# Altium PCB 94KA02-V1.PcbDoc (part 1 of 2)
Units mil, origin at the board's own origin, x right, y up, seen from the top; angles counter-clockwise.
Board outline 3951 x 3526 mil, 2 copper layers (Top Layer, Bottom Layer); 144 components, 142 nets, 661 pads, 434 vias.
Unrouted connection lines stored in the file: 1.
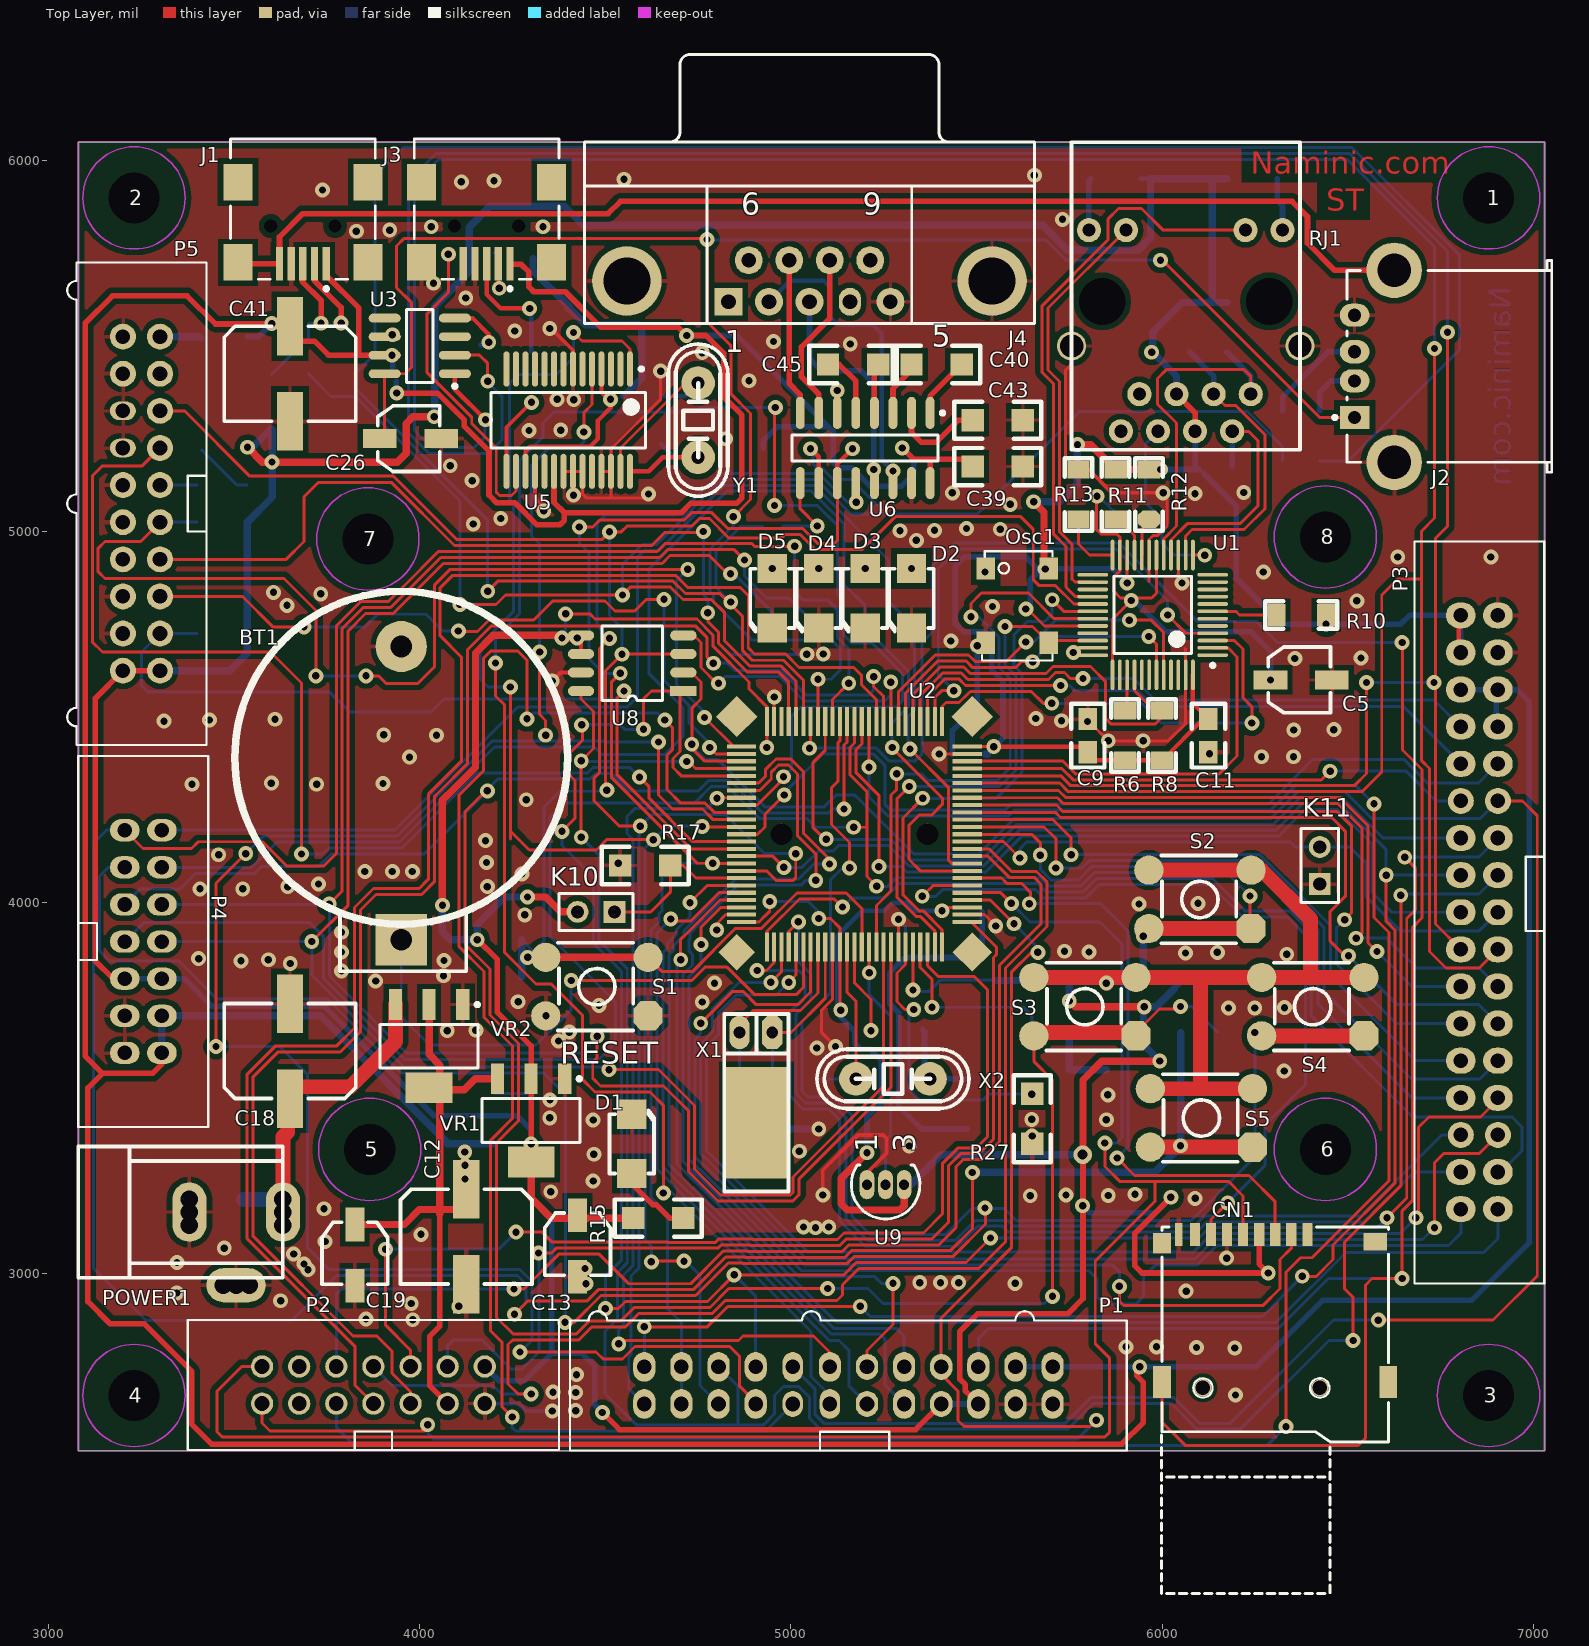
[diagram p0: Top Layer view]
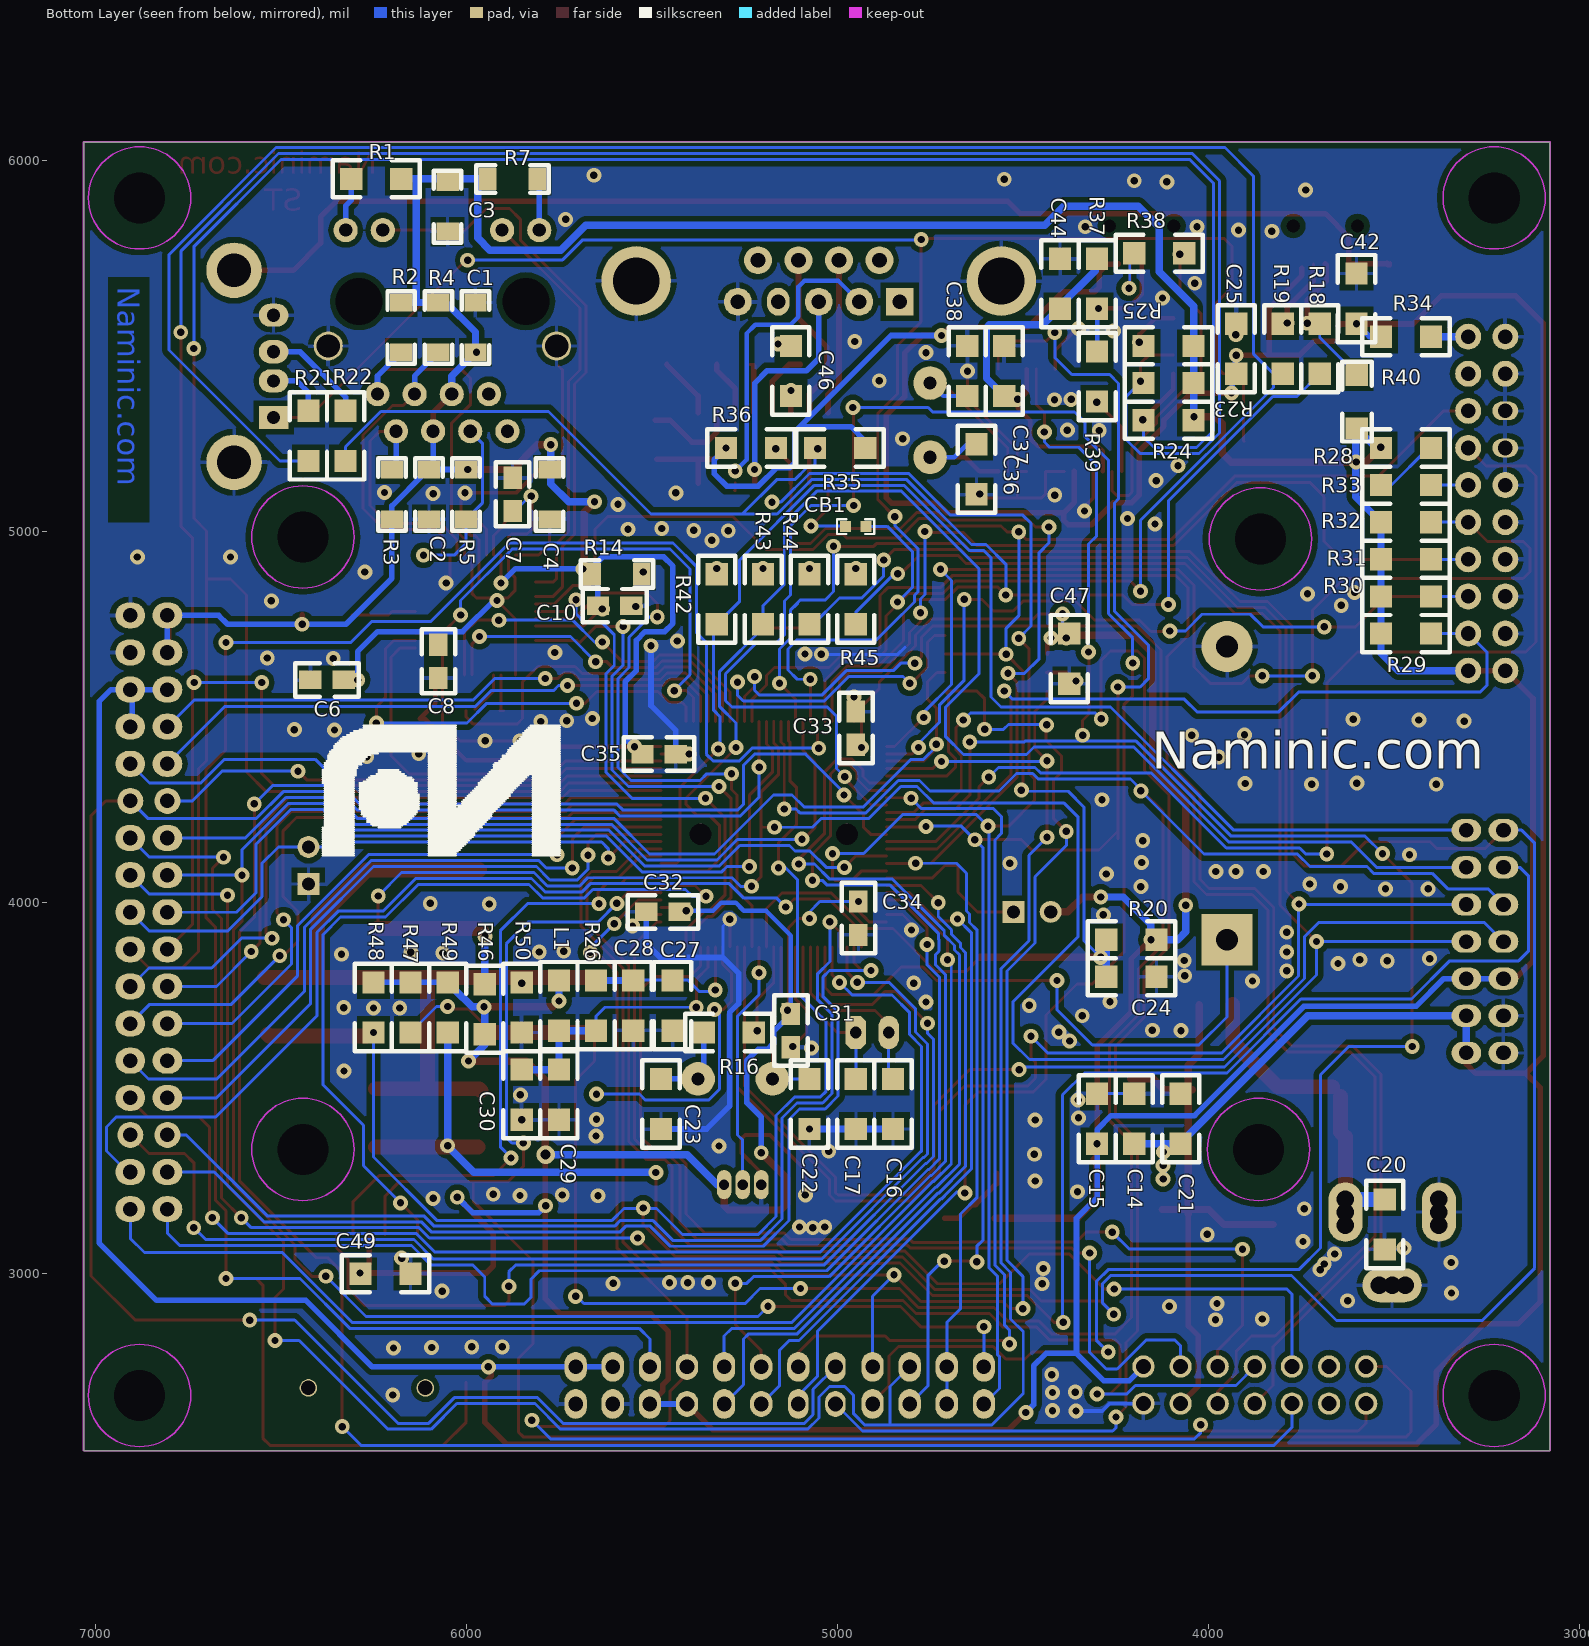
[diagram p1: Bottom Layer view, seen from below]

## Layer stack, top to bottom
Top Layer: signal copper 1.4
Dielectric: dielectric 12.6, FR-4, Dk 4.8
Bottom Layer: signal copper 1.4

## Board outline
3080,2523 3080,6049 7031,6049 7031,2523

## Design rules (kind name [scope] priority, off if disabled: settings)
Clearance pg [(inpoly)] p1: gap=15
Clearance U2 [(InComponent('U2'))] p2: gap=8
Clearance U1 [(InComponent('U1'))] p3: gap=8
Clearance [All] p4: gap=8
ComponentClearance [All] p1 off: gap=10 collisioncheckmode=3 verticalgap=10 showdistances=FALSE
FabricationTestpoint [(IsPad And (OnTopLayer Or OnBottomLayer))] p1: side=3 testpointundercomponent=TRUE minsize=40 maxsize=100 preferedsize=60 minholesize=0 maxholesize=40 preferedholesize=32 testpointgrid=1 allowsidetop=TRUE allowsidebottom=TRUE usegrid=TRUE gridtolerance=0.01
HoleSize [All] p1: absolutevalues=TRUE maxlimit=500 minlimit=1 maxpercent=80.000 minpercent=20.000
PolygonConnect PolygonConnect_1 [All vs (InPadClass('All Pads'))] p1: connectstyle=Relief reliefconductorwidth=10 reliefentries=4 polygonreliefangle="90 Angle"
PolygonConnect [All] p2: connectstyle=Direct reliefconductorwidth=10 reliefentries=4 polygonreliefangle="90 Angle"
RoutingVias [All] p1: holewidth=20 width=40 viastyle="Through Hole" minholewidth=20 minwidth=30 maxholewidth=40 maxwidth=60
SilkscreenOverComponentPads [All] p1: minsilkscreentomaskgap=10
SolderMaskExpansion [All] p1: expansion=4
Width [All] p1: maxlimit=100 minlimit=8 preferedwidth=8
24 further rules are at their usual default settings.

## Classes and differential pairs
component class ethernet: C1 C2 C3 C4 C5 C6 C7 C8 C9 C10 C11 Osc1 R1 R2 R3 R4 R5 R6 R7 R8 R10 R11 R12 R13 R14 RJ1 U1
component class madule: P1 P2 P3 P4
component class mainBoard: 1 2 3 4 5 6 7 8 BT1 C12 C13 C14 C15 C16 C17 C18 C19 C20 C21 C22 C23 C24 C25 C26 C27 C28 C29 C30 C31 C32 C33 C34 C35 D1 J1 J2 K10 K11 L1 P5 POWER1 R15 R16 R17 R18 R19 R20 R21 R22 R23 R24 R25 R26 R27 R28 R29 R30 R31 R32 R33 R34 R40 S1 U2 U3 VR1 VR2 X1 X2
component class peripheral: C36 C37 C38 C39 C40 C41 C42 C43 C44 C45 C46 C47 C48 C49 CN1 D2 D3 D4 D5 J3 J4 R35 R36 R37 R38 R39 R42 R43 R44 R45 R46 R47 R48 R49 R50 S2 S3 S4 S5 U5 U6 U7 U8 U9 Y1
net class PE[0..15]: PE0 PE1 PE2 PE3 PE4 PE5 PE6 PE7 PE8 PE9 PE10 PE11 PE12 PE13 PE14 PE15

## Components (designator, comment, footprint, x,y, rotation, side; value= is the part's Value field where it differs from the comment)
1 "PAD" pad 6880,5899 r90 top
2 "PAD" pad 3230,5899 r90 top
3 "PAD" pad 6880,2672 r90 top
4 "PAD" pad 3230,2672 r90 top
5 "PAD" pad 3865,3335 r90 top (schematic designator 3)
6 "PAD" pad 6440,3335 r90 top (schematic designator 3)
7 "PAD" pad 3860,4980 r90 top (schematic designator 3)
8 "PAD" pad 6440,4985 r90 top (schematic designator 3)
BT1 "CR1220 holder" BAT 3950,3900 r180 top
C1 "100nf" 1206#1 5975,5550 r270 bottom
C2 "100nf" 1206#1 6100,5100 r90 bottom
C3 "100nf" 1206#1 6050,5875 r90 bottom
C4 "100nf" 1206#1 5775,5100 r90 bottom
C5 "10uF" CAP10 6375,4600 r180 top
C6 "100nF" 0805#1 6375,4600 r0 bottom
C7 "100nF" 0805#1 5875,5100 r270 bottom
C8 "100nF" 0805#1 6075,4650 r90 bottom
C9 "100nF" 0805#1 5800,4450 r90 top
C10 "100nF" 0805#1 5600,4800 r0 bottom
C11 "100nF" 0805#1 6125,4450 r90 top
C12 "100uf" CAP470 4125,3100 r90 top
C13 "10uf" CAP10 4425,3075 r90 top
C14 "100nF" 1206#2 4200,3350 r90 bottom
C15 "100nF" 1206#2 4300,3350 r90 bottom
C16 "10pF" 1206#2 4850,3525 r270 bottom
C17 "10pF" 1206#2 4950,3525 r270 bottom
C18 "100uf" CAP470 3650,3600 r270 top
C19 "10uf" CAP10 3825,3050 r90 top
C20 "100nF" 1206#2 3525,3200 r270 bottom
C21 "100nF" 1206#2 4075,3350 r90 bottom
C22 "20pF" 1206#2 5075,3525 r270 bottom
C23 "20pF" 1206#2 5475,3525 r270 bottom
C24 "100nF" 1206#2 4140,3800 r0 bottom
C25 "100nF" 1206#2 3925,5425 r90 bottom
C26 "10uf" CAP10 3975,5250 r180 top
C27 "10uF" 1206#2 5444,3790 r270 bottom
C28 "100nF" 1206#2 5550,3790 r270 bottom
C29 "10uf(smd)" 1206#2 5750,3550 r270 bottom
C30 "100nF" 1206#2 5850,3550 r270 bottom
C31 "100nF" 0805#2 5125,3700 r270 bottom
C32 "100nF" 0805#2 5425,3975 r0 bottom
C33 "100nF" 0805#2 4950,4425 r90 bottom
C34 "100nF" 0805#2 4943,4003 r270 bottom
C35 "100nF" 0805#2 5525,4400 r180 bottom
C36 "10pF" 1206#2 4625,5100 r90 bottom
C37 "100nF" 1206#2 4550,5500 r270 bottom
C38 "10pF" 1206#2 4650,5500 r270 bottom
C39 "100nF" 1206#2 5625,5175 r180 top
C40 "100nF" 1206#2 5325,5450 r0 top
C41 "100uF" CAP470 3650,5425 r90 top
C42 "100nF" 1206#2 3601,5695 r270 bottom
C43 "100nF" 1206#2 5625,5300 r180 top
C44 "100nF" 1206#2 4400,5735 r270 bottom
C45 "100nF" 1206#2 5100,5450 r0 top
C46 "100nF" 1206#2 5125,5500 r270 bottom
C47 "100nF" 1206#2 4375,4725 r270 bottom
C49 "100nF" 1206#2 6150,3000 r0 bottom
CB1 "Circuit Breaker" 0603c 4978,5013 r0 bottom
CN1 "microsd" MicroSD_1 6305,2899 r0 top
D1 "LED3" LED-1206 4571,3270 r90 top (schematic designator D5)
D2 "LED3" LED-1206 5325,4900 r270 top
D3 "LED3" LED-1206 5200,4900 r270 top
D4 "LED3" LED-1206 5075,4900 r270 top
D5 "LED3" LED-1206 4950,4900 r270 top
J1 "1-1470156-2" 440247 3685,6030 r90 top
J2 "USBH" 787761 7050,5445 r0 top
J3 "1-1470156-2" 440247 4180,6030 r90 top (schematic designator J2)
J4 "D Connector 9" DSUB1.385-2H9 5050,6049 r0 top (schematic designator J3)
K10 "Header 2" HDR1X2 4525,3975 r180 top
K11 "Header 2" HDR1X2 6425,4050 r90 top
L1 "BEAD" 1206#2 5750,3790 r270 bottom
Osc1 "OSILATOR" XTAL_5X7 5525,4900 r0 top
P1 "Header 12X2" IDC24S 4605,2649 r90 top (schematic designator P3)
P2 "Header 5X2" IDC14S#1 3575,2650 r90 top (schematic designator P5)
P3 "Header 17X2" IDC34S 6905,3174 r180 top (schematic designator P2)
P4 "Header 7X2" IDC14S#2 3205,4195 r0 top
P5 "Header 10X2" IDC20S 3300,4625 r180 top (schematic designator P1)
POWER1 "POWER" "power jack" 3505,3085 r270 top
R1 "220R" 1206#2 6175,5950 r0 bottom
R2 "47R" 1206#1 6175,5550 r90 bottom
R3 "47R" 1206#1 6200,5100 r270 bottom
R4 "47R" 1206#1 6075,5550 r90 bottom
R5 "47R" 1206#1 6000,5100 r90 bottom
R6 "2K2" 1206#1 5900,4450 r90 top
R7 "220R" 1206#1 5875,5950 r180 bottom
R8 "2K2" 1206#1 6000,4450 r90 top
R10 "2K2" 1206#1 6375,4775 r180 top
R11 "2K2" 1206#1 5875,5100 r90 top
R12 "2K2" 1206#3 5965,5100 r90 top
R13 "4.87K" 1206#1 5775,5100 r270 top
R14 "10K" 1206#1 5594,4885 r0 bottom
R15 "100" 1206#2 4575,3150 r0 top
R16 "220" 1206#2 5225,3650 r0 bottom
R17 "10K" 1206#2 4675,4100 r180 top
R18 "33R" 1206#2 3700,5425 r90 bottom (schematic designator R19)
R19 "33R" 1206#2 3800,5425 r90 bottom
R20 "1K" 1206#2 4275,3900 r180 bottom
R21 "33R" 1206#2 6425,5325 r270 bottom
R22 "33R" 1206#2 6325,5325 r270 bottom
R23 "10K" 1206#2 4175,5400 r180 bottom
R24 "10K" 1206#2 4175,5300 r180 bottom
R25 "10K" 1206#2 4175,5500 r180 bottom
R26 "47R" 1206#2 5650,3790 r270 bottom
R27 "0R" 1206#2 5650,3350 r90 top
R28 "10K" 1206#2 3400,5225 r0 bottom
R29 "10K" 1206#2 3400,4725 r0 bottom
R30 "10K" 1206#2 3400,4825 r0 bottom
R31 "10K" 1206#2 3400,4925 r0 bottom
R32 "10K" 1206#2 3400,5025 r0 bottom
R33 "0R" 1206#2 3400,5125 r0 bottom
R34 "0R" 1206#2 3400,5525 r0 bottom
R35 "100K" 1206#2 4925,5225 r0 bottom
R36 "100K" 1206#2 5300,5225 r180 bottom
R37 "1.5k" 1206#2 4300,5600 r90 bottom
R38 "27" 1206#2 4200,5750 r180 bottom
R39 "27" 1206#2 4300,5350 r90 bottom
R40 "120" 1206#4 3600,5350 r90 bottom
R42 "180" 1206#2 5325,4750 r90 bottom
R43 "180" 1206#2 5200,4750 r90 bottom
R44 "180" 1206#2 5075,4750 r90 bottom
R45 "180" 1206#2 4950,4750 r90 bottom
R46 "330R" 1206#2 5950,3780 r270 bottom
R47 "330R" 1206#2 6150,3650 r90 bottom
R48 "330R" 1206#2 6250,3650 r90 bottom
R49 "330R" 1206#2 6050,3650 r90 bottom
R50 "330" 1206#2 5850,3650 r90 bottom
RJ1 "RJ45 filter" RJ45LED 6240,5370 r90 top
S1 "RESET" SWSMD 4475,3775 r180 top (schematic designator S4)
S2 "UP" SWSMD 6100,4010 r180 top
S3 "DOWN" SWSMD 5790,3721 r180 top
S4 "LEFT" SWSMD 6404,3721 r180 top (schematic designator S1)
S5 "RIGHT" SWSMD 6104,3421 r180 top (schematic designator S6)
U1 "DP83848CVV" TQFP48_M 5975,4775 r180 top
U2 "STM32F107VCT" TQ100_TOOL 4935,3880 r0 top
U3 "LM3526M-L" M08A_N 4000,5500 r180 top
U5 "PL2303HX" SSOP-SS28_M 4400,5300 r270 top
U6 "MAX232AESE" NSO16_N 5200,5225 r270 top
U8 "AT45DB161B" SOP8 4710,4570 r180 top
U9 "LM35" to-92 5255,3240 r90 top
VR1 "ASM1117 3.3V" Regolator 4300,3400 r270 top
VR2 "ASM1117 5V" Regolator 4025,3600 r270 top
X1 "32.768Khz" Xtal1 4950,3650 r180 top (schematic designator Y4)
X2 "25MHz (with socket)" XTAL3 5375,3525 r180 top
Y1 "XTAL" XTAL3 4750,5200 r90 top

## Footprints (in the part's own frame and the unit in brackets; to place one, negate y for a bottom-side part, rotate by r counter-clockwise, add the part's x,y. Pads: shape width x height; smd on the part's side, far side on the other; paste and mask are expansions set on the pad)
0603c [mil]
  rect 30x30 smd: 1(0,0) 2(-55,0)
  silkscreen extent -78,-20 22,20
0805#1 [mil]
  rect 60x50 smd: 1(-45,0) 2(45,0)
  silkscreen extent -86,-45 86,45
0805#2 [mil]
  rect 60x50 smd: 1(0,0) 2(90,0)
  silkscreen extent -50,-45 140,45, body extent -16,-23 107,25, height 39
1206#1 [mil]
  rect 48.19x60 smd: 1(-66.99,0) 2(66.99,0)
  silkscreen extent -98,-37 98,37
1206#2 [mil]
  rect 60x60 smd: 1(0,0) 2(135,0)
  silkscreen extent -50,-50 185,50
1206#3 [mil]
  oct 48.19x60 smd: 1(-66.99,0)
  rect 48.19x60 smd: 2(66.99,0)
  silkscreen extent -98,-37 98,37
1206#4 [mil]
  rect 60x60 smd: 1(-72.5,0) 2(72.5,0)
  silkscreen extent -108,-40 108,40
440247 [mm] "Connector; USB2.0, Type B, SM; 5 Position; Right Angle"
  rect 2.3x0.5 smd: 1(-7.85,-1.6) 2(-7.85,-0.8) 3(-7.85,0) 4(-7.85,0.8) 5(-7.85,1.6)
  rect 2.5x2 smd: 6(-7.75,4.45) 7(-2.25,4.45) 8(-7.75,-4.45) 9(-2.25,-4.45)
  round 0.6 hole 0.9 unplated: MH1(-5.25,2.2) MH2(-5.25,-2.2)
  silkscreen extent -9.67,-4.95 0.7,4.95
787761 [mm] "Connector; USB1.1, Type A, Thru-Hole; 4 Position; Right Angle"
  rect 2.032x1.6 hole 0.9: 1(-13.49,-3.5)
  oval 2.032x1.6 hole 0.9: 2(-13.49,-1) 3(-13.49,1)
  oval 2.032x1.575 hole 0.9: 4(-13.49,3.5)
  round 3.8 hole 2.3: 5(-10.78,6.57) 6(-10.78,-6.57)
  silkscreen extent -14.96,-7.25 0,7.25
BAT [mm]
  rect 3.5x3.5 hole 1.5: 1(0,0)
  round 3.5 hole 1.5: 2(0,-20.066)
  silkscreen extent -11.39,-23.83 11.39,2.16
CAP10 [mm]
  rect 2.3x1.3 smd: 1(2.1,0) 2(-2.1,0)
  silkscreen extent -2,-2.25 2.25,2.25
CAP470 [mm]
  rect 4x1.8 smd: 1(3.25,0) 2(-3.25,0)
  silkscreen extent -3.25,-4.5 3.25,4.5
DSUB1.385-2H9 [mm] "Connector; D Subminiature; 9 Position; Right Angle; Pitch 1.385 mm"
  rect 1.905x1.905 hole 1: 1(-5.54,-10.92)
  round 1.905 hole 1: 2(-2.77,-10.92) 3(0,-10.92) 5(5.54,-10.92) 6(-4.155,-8.08) 7(-1.385,-8.08) 8(1.385,-8.08) 9(4.155,-8.08)
  oval 1.524x1.905 hole 1: 4(2.77,-10.92)
  round 4.76 hole 3.2: 10(-12.495,-9.5) 11(12.495,-9.5)
  silkscreen extent -15.4,-12.4 15.4,6
HDR1X2 [mm] "Connector; Header; 2 Position"
  rect 1.5x1.5 hole 0.9: 1(0,0)
  round 1.5 hole 0.9: 2(2.54,0)
  silkscreen extent -1.27,-1.27 3.81,1.27
IDC14S#1 [mil]
  round 60 hole 40: 1(0,0) 2(100,0) 3(0,-100) 4(100,-100) 5(0,-200) 6(100,-200) 7(0,-300) 8(100,-300) 9(0,-400) 10(100,-400) 11(0,-500) 12(100,-500) 13(0,-600) 14(100,-600)
  silkscreen extent -125,-800 225,200
IDC14S#2 [mil]
  oval 80x60 hole 39.37: 1(0,0) 2(100,0) 3(0,-100) 4(100,-100) 5(0,-200) 6(100,-200) 7(0,-300) 8(100,-300) 9(0,-400) 10(100,-400) 11(0,-500) 12(100,-500) 13(0,-600) 14(100,-600)
  silkscreen extent -125,-800 225,200
IDC20S [mil]
  round 70 hole 39.37: 1(0,0) 2(100,0) 3(0,-100) 4(100,-100) 5(0,-200) 6(100,-200) 7(0,-300) 8(100,-300) 9(0,-400) 10(100,-400) 11(0,-500) 12(100,-500) 13(0,-600) 15(0,-700) 17(0,-800) 18(100,-800) 19(0,-900) 20(100,-900)
  oval 70x50 hole 39.37: 14(100,-600) 16(100,-700)
  silkscreen extent -125,-1100 250,200
IDC24S [mil]
  oval 80x60 hole 39.37: 1(0,0) 2(100,0) 3(0,-100) 4(100,-100) 5(0,-200) 6(100,-200) 7(0,-300) 8(100,-300) 12(100,-500) 15(0,-700) 16(100,-700) 19(0,-900) 20(100,-900) 21(0,-1000) 22(100,-1000) 23(0,-1100) 24(100,-1100)
  oval 70x55 hole 39.37: 9(0,-400)
  oval 80x55 hole 39.37: 10(100,-400) 11(0,-500)
  oval 70x60 hole 39.37: 13(0,-600) 14(100,-600) 17(0,-800) 18(100,-800)
  silkscreen extent -125,-1300 250,200
IDC34S [mil]
  oval 80x70 hole 39.37: 1(0,0) 2(100,0) 3(0,-100) 4(100,-100) 7(0,-300) 8(100,-300) 9(0,-400) 10(100,-400) 11(0,-500) 12(100,-500) 13(0,-600) 14(100,-600) 15(0,-700) 16(100,-700) 17(0,-800) 18(100,-800) 19(0,-900) 20(100,-900) 21(0,-1000) 22(100,-1000) 25(0,-1200) 26(100,-1200) 27(0,-1300) 28(100,-1300) 29(0,-1400) 30(100,-1400) 31(0,-1500) 32(100,-1500) 33(0,-1600) 34(100,-1600)
  round 70 hole 39.37: 5(0,-200) 6(100,-200) 23(0,-1100) 24(100,-1100)
  silkscreen extent -125,-1799 225,200
LED-1206 [mm]
  rect 2x2 smd: 1(0,0) 2(4.064,0)
  silkscreen extent 0,-1.52 4.32,1.52
M08A_N [mm] "SOIC, 8-Leads, Body 4.9x3.9mm, Pitch 1.27mm, IPC Medium Density"
  oval 2.2x0.6 smd: 1(-2.4,1.905) 2(-2.4,0.635) 3(-2.4,-0.635) 4(-2.4,-1.905) 5(2.4,-1.905) 6(2.4,-0.635) 7(2.4,0.635) 8(2.4,1.905)
  silkscreen extent -2.53,-2.5 0.9,2.88, body extent -2,-2.5 2,2.5, height 1.75
MicroSD_1 [mm] "altium designer (M.Hariri)"
  round 1.2 hole 1: 0(-4.95,-5.25) 0(3.05,-5.25)
  rect 0.7x1.6 smd: 1(2.2,5.25) 2(1.1,5.25) 3(0,5.25) 4(-1.1,5.25) 5(-2.2,5.25) 6(-3.3,5.25) 7(-4.4,5.25) 8(-5.5,5.25)
  rect 0.508x1.6 smd: 9(-6.6,5.25)
  rect 1.2x2.2 smd: 10(-7.75,-4.85) sh3(7.75,-4.85)
  rect 1.2x1.4 smd: sh1(-7.75,4.65)
  rect 1.6x1.2 smd: sh4(6.85,4.75)
  silkscreen extent -7.77,-19.32 7.74,5.77
NSO16_N [mm] "SOIC, 16-Leads, Body 9.9x3.9mm, Pitch 1.27mm, IPC Medium Density"
  oval 2.2x0.6 smd: 1(-2.4,4.445) 2(-2.4,3.175) 3(-2.4,1.905) 4(-2.4,0.635) 5(-2.4,-0.635) 6(-2.4,-1.905) 7(-2.4,-3.175) 8(-2.4,-4.445) 9(2.4,-4.445) 10(2.4,-3.175) 11(2.4,-1.905) 12(2.4,-0.635) 13(2.4,0.635) 14(2.4,1.905) 15(2.4,3.175) 16(2.4,4.445)
  silkscreen extent -2.52,-5 0.9,5.42, body extent -2,-5 2,5, height 1.75
pad [mm]
  round 2.8 hole 3.5: 1(0,0)
  Keep-Out Layer circle w0.1: c0,0 r3.5
"power jack" [mil] "BY:SAFAGHI"
  round 47 hole 47.24: 1(-116,126) 1(-46,126) 2(-116,-126) 2(-46,-126) 2(116,-35) 2(116,35)
  oval 160x92 hole 47.24: 1(-81,126) 2(-81,-126)
  oval 92x160 hole 47.24: 2(116,0)
  silkscreen extent -258,-425 96,126
Regolator [mm]
  rect 2.1x0.9 smd: 1(-3.18,2.3) 3(-3.18,-2.3) 4(-3.18,0)
  rect 2.1x3.2 smd: 4(2.52,0)
  silkscreen extent -3.31,-3.35 1.17,3.43
RJ45LED [mm]
  round 1.65 hole 0.9: 1(0,0.025) 2(-2.54,1.295) 3(0,2.565) 4(-2.54,3.835) 5(0,5.105) 6(-2.54,6.375) 7(0,7.645) 8(-2.54,8.915) 9(11.225,-2.151) 10(11.225,0.389) 11(11.225,8.559) 12(11.225,11.099)
  round 2 hole 1.6: 13(3.3,12.285) 14(3.3,-3.345)
  rect 0x0 hole 3.2: ""(6.35,10.185) ""(6.35,-1.245)
  silkscreen extent -3.81,-3.34 17.24,12.29
SOP8 [mm]
  rect 1.8x0.7 smd: 1(0,0)
  oval 1.8x0.7 smd: 2(0,-1.27) 3(0,-2.54) 4(0,-3.81) 5(7,-3.81) 6(7,-2.54) 7(7,-1.27) 8(7,0)
  silkscreen extent 1.43,-4.44 5.56,0.64
SSOP-SS28_M [mm] "SOP, 28-Leads, Body 10.2x5.2mm, Pitch 0.65mm, IPC Low Density"
  oval 2.4x0.406 smd: 1(-3.5,4.225) 2(-3.5,3.575) 3(-3.5,2.925) 4(-3.5,2.275) 5(-3.5,1.625) 6(-3.5,0.975) 7(-3.5,0.325) 8(-3.5,-0.325) 9(-3.5,-0.975) 10(-3.5,-1.625) 11(-3.5,-2.275) 12(-3.5,-2.925) 13(-3.5,-3.575) 14(-3.5,-4.225) 15(3.5,-4.225) 16(3.5,-3.575) 17(3.5,-2.925) 18(3.5,-2.275) 19(3.5,-1.625) 20(3.5,-0.975) 21(3.5,-0.325) 22(3.5,0.325) 23(3.5,0.975) 24(3.5,1.625) 25(3.5,2.275) 26(3.5,2.925) 27(3.5,3.575) 28(3.5,4.225)
  silkscreen extent -3.62,-5.3 1.9,5.3, body extent -2.7,-5.3 2.7,5.3, height 2
SWSMD [mm]
  oct 2x2 smd: 1(-3.556,2.032)
  round 2 smd: 1(3.444,2.032) 2(-3.556,-1.968) 2(3.444,-1.968)
  silkscreen extent -2.54,-2.97 2.6,3.03
to-92 [mm] "TO, Flat Index; 3 In-Line, Axial Leads; Body Dia. 4.6mm; Leads 0.41 x 0.39 mm (max)"
  oval 2x1 hole 0.7: 1(0,1.27) 2(0,0) 3(0,-1.27)
  silkscreen extent -2.34,-2.34 1.35,2.34
TQ100_TOOL [mm]
  rect 1.778x1.778 smd rot 135: 0(-2.06,-0.335)
  rect 2x2 smd rot 45: 0(-2.06,15.785)
  oval 0.279x1.5 hole 1.5 unplated: 0(1,7.725) 0(11,7.725)
  rect 1.905x1.905 smd rot 45: 0(14.06,-0.335)
  rect 2x2 smd rot 135: 0(14.06,15.785)
  rect 0.279x2 smd: 1(0,0) 2(0.5,0) 3(1,0) 4(1.5,0) 5(2,0) 6(2.5,0) 7(3,0) 8(3.5,0) 9(4,0) 10(4.5,0) 11(5,0) 12(5.5,0) 13(6,0) 14(6.5,0) 15(7,0) 16(7.5,0) 17(8,0) 18(8.5,0) 19(9,0) 20(9.5,0) 21(10,0) 22(10.5,0) 23(11,0) 24(11.5,0) 25(12,0) 51(12,15.45) 52(11.5,15.45) 53(11,15.45) 54(10.5,15.45) 55(10,15.45) 56(9.5,15.45) 57(9,15.45) 58(8.5,15.45) 59(8,15.45) 60(7.5,15.45) 61(7,15.45) 62(6.5,15.45) 63(6,15.45) 64(5.5,15.45) 65(5,15.45) 66(4.5,15.45) 67(4,15.45) 68(3.5,15.45) 69(3,15.45) 70(2.5,15.45) 71(2,15.45) 72(1.5,15.45) 73(1,15.45) 74(0.5,15.45) 75(0,15.45)
  rect 2x0.279 smd: 26(13.725,1.725) 27(13.725,2.225) 28(13.725,2.725) 29(13.725,3.225) 30(13.725,3.725) 31(13.725,4.225) 32(13.725,4.725) 33(13.725,5.225) 34(13.725,5.725) 35(13.725,6.225) 36(13.725,6.725) 37(13.725,7.225) 38(13.725,7.725) 39(13.725,8.225) 40(13.725,8.725) 41(13.725,9.225) 42(13.725,9.725) 43(13.725,10.225) 44(13.725,10.725) 45(13.725,11.225) 46(13.725,11.725) 47(13.725,12.225) 48(13.725,12.725) 49(13.725,13.225) 50(13.725,13.725) 76(-1.725,13.725) 77(-1.725,13.225) 78(-1.725,12.725) 79(-1.725,12.225) 80(-1.725,11.725) 81(-1.725,11.225) 82(-1.725,10.725) 83(-1.725,10.225) 84(-1.725,9.725) 85(-1.725,9.225) 86(-1.725,8.725) 87(-1.725,8.225) 88(-1.725,7.725) 89(-1.725,7.225) 90(-1.725,6.725) 91(-1.725,6.225) 92(-1.725,5.725) 93(-1.725,5.225) 94(-1.725,4.725) 95(-1.725,4.225) 96(-1.725,3.725) 97(-1.725,3.225) 98(-1.725,2.725) 99(-1.725,2.225) 100(-1.725,1.725)
TQFP48_M [mm] "48-Pin Thin Quad Flat Pack 0.5 mm Pitch, IPC Low Density"
  oval 2.1x0.254 smd: 1(-4.1,2.75) 2(-4.1,2.25) 3(-4.1,1.75) 4(-4.1,1.25) 5(-4.1,0.75) 6(-4.1,0.25) 7(-4.1,-0.25) 8(-4.1,-0.75) 9(-4.1,-1.25) 10(-4.1,-1.75) 11(-4.1,-2.25) 12(-4.1,-2.75) 25(4.1,-2.75) 26(4.1,-2.25) 27(4.1,-1.75) 28(4.1,-1.25) 29(4.1,-0.75) 30(4.1,-0.25) 31(4.1,0.25) 32(4.1,0.75) 33(4.1,1.25) 34(4.1,1.75) 35(4.1,2.25) 36(4.1,2.75)
  oval 0.254x2.1 smd: 13(-2.75,-4.1) 14(-2.25,-4.1) 15(-1.75,-4.1) 16(-1.25,-4.1) 17(-0.75,-4.1) 18(-0.25,-4.1) 19(0.25,-4.1) 20(0.75,-4.1) 21(1.25,-4.1) 22(1.75,-4.1) 23(2.25,-4.1) 24(2.75,-4.1) 37(2.75,4.1) 38(2.25,4.1) 39(1.75,4.1) 40(1.25,4.1) 41(0.75,4.1) 42(0.25,4.1) 43(-0.25,4.1) 44(-0.75,4.1) 45(-1.25,4.1) 46(-1.75,4.1) 47(-2.25,4.1) 48(-2.75,4.1)
  silkscreen extent -4.23,-2.65 2.65,3.57, body extent -3.5,-3.5 3.5,3.5, height 1.6
Xtal1 [mil]
  oct 55x90 hole 31.5: 1(0,0)
  oval 55x90 hole 31.5: 2(88.5,0)
  rect 173.23x300 smd: gnd(43.3,242.9)
  silkscreen extent -43,-50 129,429
XTAL3 [mm]
  round 2.3 hole 0.9: 1(0,0) 2(5.08,0)
  silkscreen extent -2.67,-2.03 7.75,2.03
XTAL_5X7 [mil]
  rect 50x60 smd: 1(0,0) 2(0,-200) 3(170,-200) 4(170,0)
  silkscreen extent -10,-248 180,47

## Part data
BT1: library part Battery, "Multicell Battery"
C1 C2 C3 C4: library part CAP
C6 C7 C8 C9 C10 C11 C16 C17 C22 C23 C24: library part CAP, "Capacitor"
C12 C18 C29 C41: library part "Cap Pol1", "Polarized Capacitor (Radial)"
C14 C15 C20 C21: library part "Cap Semi", "Capacitor (Semiconductor SIM Model)"
C25 C27 C28 C30 C31 C32 C33 C34 C35 C36 C37 C38 C39 C40 C42 C43 C44 C45 C46 C47 C49: library part Cap, "Capacitor"
CN1: library part SMS016AFA5E
D1 D2 D3 D4 D5: "Typical BLUE SiC LED"
J1 J3: "USB 1.1, Right Angle, Thru-Hole, B Type, Receptacle, 4 Position, Black"
J2: library part 787761-3, "USB 1.1, Right Angle, Thru-Hole, A Type, Receptacle, 4 Position, Natural"
J4: "Receptacle Assembly, 9 Position, Right Angle"
L1: library part Inductor, "Inductor"
P1: "Header, 12-Pin, Dual row"
P2: library part "Header 7X2", "Header, 7-Pin, Dual row"
P3: "Header, 17-Pin, Dual row"
P4: "Header, 7-Pin, Dual row"
P5: "Header, 10-Pin, Dual row"
POWER1: library part "Header 2H", "Header, 2-Pin, Right Angle"
R1 R7 R14 R15: library part Res3, "Resistor"
R2 R3 R4 R5 R6 R8 R10 R11 R12 R13 R16 R18 R19 R21 R22 R26 R27 R28 R29 R30 R31 R32 R33 R34 R35 R36 R37 R38 R39 R40: library part Res1, "Resistor"
R17 R20: library part res1, "Resistor"
R23 R24 R25: library part RES1
R42 R43 R44 R45 R46 R47 R48 R49 R50: library part "Res Semi", "Semiconductor Resistor"
RJ1: library part RJ45_led_filter
S1 S2 S3 S4 S5: library part SW-PB, "Switch"
U1: library part DM9161A
U2: library part AT91SAM7XC256-AU, "Smart ARM Microcontroller, ARM7TDMI 32-Bit RISC CPU, 256KB Flash and 64KB SRAM, 100-Pin LQFP, Industrial, Pb-Free"
U3: "Dual Port USB Power Switch and Over-Current Protection"
U5: library part PL2303
U6: "+5V-Powered, Multichannel RS-232 Driver/Receiver"
U9: library part "Volt Reg", "Voltage Regulator"
VR1 VR2: library part "Volt Reg_1", "Voltage Regulator"
X1: library part XTAL, "Crystal Oscillator"
X2: library part CRYSTAL, "Crystal"
Y1: "Crystal Oscillator"

## Via types
v1: diameter 40, hole 19.68, Top Layer to Bottom Layer, 416 vias
v2: diameter 40, hole 20, Top Layer to Bottom Layer, 16 vias
v3: diameter 50, hole 27.56, Top Layer to Bottom Layer, 1 vias
v4: diameter 40, hole 19.68, Top Layer to Bottom Layer, tented bottom, 1 vias

## Nets (pads, with @x,y where several pads share a name; then routed paths per layer and width w, separated by ;. In a path a pad name is that pad's centre, name@x,y a point inside that pad or via, vN(x,y) a via of type N, cw(c..) or ccw(c..) an arc to the next point about the centre after c; other vN are vias at no path point)
"50 MHZ": Osc1.3 U1.34 U2.24 | length 1532.5
  Top Layer w8: v1@5315.63,4313 v1(5319,4313) 5286,4280 5286,4014.37 5338.37,3962 5349.76,3962 5387.76,3924 U2.24@5387.76,3880 ; v1(5577,4744) 5651,4744 Osc1.3@5695,4700 5701.1,4706.1 U1.34@5813.58,4706.1
  Bottom Layer w8: v1(5319,4313) 5562.37,4313 5607,4357.63 5607,4372 ; v1(5577,4744) 5577,4640 5607,4610 5607,4372 ; 5607,4443 5607,4372
+3.3: C1.2 C2.2 C3.2 C4.2 C9.1 C10.2 C11.2 C13.1 C15.1 C31.1 C32.1 C33.1 C34.1 C35.1 C47.1 C49.2 CN1.4 K10.2 L1.1 Osc1.4 P1.17 P1.19 P2.14 P3.32 P3.34 P4.9 P4.10 P5.1 P5.2 R1.1 R2.2 R3.2 R4.2 R5.2 R6.1 R7.1 R8.1 R10.1 R11.2 R12.2 R14.2 R15.1 R20.2 R23.2 R24.2 R25.2 R28.2 R29.2 R30.2 R31.2 R32.2 R40.1 R46.2 R47.2 R48.2 R49.2 RJ1.4 RJ1.5 U1.22 U1.32 U1.48 U2.11 U2.28 U2.50 U2.75 U2.100 U8.5 U8.6 U9.3 VR1.4 | length 23480.7
  Top Layer w8: v1(4393,4778) 4458,4778 4472,4764 4746.74,4764 4789.43,4721.31 4789.43,4691.82 4887,4594.25 4887,4576 4935,4528 U2.75@4935,4488.27 v1(4935,4418) ; U2.100@4867.09,3947.91 4913.91,3947.91 ; 4929,3963 4913.91,3947.91 ; v1(4943,4003) 4943,3977 4913.91,3947.91 ; v1(5075,3957) 5107,3957 5131.85,3932.15 U2.11@5131.85,3880 5131.85,3710.15 v1(5134.15,3710.15) ; v1@5408.28,3987.28 U2.28@5475.35,3987.28 ; U2.50@5475.35,4420.35 v1(5546.35,4420.35) ; v1@5639,4790 5683.53,4745.47 U1.32@5813.58,4745.47 ; v1(5906,4861) U1.22@5906.1,4936.42
  Top Layer w12: U8.6@4434.41,4670 U8.5@4434.41,4713 ; v1(5546.35,4420.35) 5773.65,4420.35 C9.1@5794.5,4399.5 ; C9.1@5810.99,4383.01 R6.1@5900,4383.01 R8.1@6000,4383.01 6111.99,4495 C11.2@6125,4495 6083.27,4536.73 U1.48@6083.27,4613.58 ; P3.32@6800,4650 P3.34@6800,4750
  Top Layer w15: P4.9@3205,3795 3173,3795 3125.5,3842.5 3125.5,4550.5 P5.2@3200,4625 P5.1@3300,4625 ; v1(4155,3900) 4156,3900 4208.5,3847.5 4208.5,3705.5 4300,3614 VR1.4@4300,3525.2 v1(4300,3350) 4300,3319 VR1.4@4310,3309 ; v2(4491.99,2626.01) 4538,2580 5336,2580 P1.17@5405,2649 ; 5146,3267 v2(5205,3326) ; P1.19@5505,2649 5470,2684 5470,2701 5455,2716 5455,2844 5503,2892 5746,2892 5787,2933 v3@5787,3320 ; v2(6024,3206) 5927,3109 5927,3021 5946,3002 v1(6286,3002) 6261.69,3026.31 CN1.4@6261.69,3105.69 ; RJ1.5@6039,5370 6089,5320 RJ1.4@6089,5270 ; v1(6441.99,4750.01) R10.1@6441.99,4775
  Top Layer w20: v1(3536,5227) 3576,5187 3939,5187 3963,5211 3963,5291 3981,5309 v1(4039,5309) ; v1(4061,3993) 4061,4276.11 4092.17,4307.28 4150,4365.11 4150,4671.63 4198.37,4720 v1@4383,4720 ; v1(4290,4015) 4339,4015 4379,3975 K10.2@4425,3975 ; VR1.4@4300,3300.8 4300,3204 4354,3150 R15.1@4575,3150 ; v1(4383,4713) v1(4424,4713) ; v2(5205,3326) 5136,3257 5136,3188 5152.26,3171.74 5293.74,3171.74 5305,3183 U9.3@5305,3240 ; v1(5654,5080) 5682,5052 5682,4902 v1(5685,4899) ; v1(5750,3735) 5766,3719 v1(5952,3719) ; v1(5772,5234) 5807.99,5234 R11.2@5875,5166.99 R12.2@5975,5166.99 ; v3@5787,3321 5787,3522 5838,3573 v1(5994,3573)
  Bottom Layer w8: C47.1@4390,4729 4393,4732 v1(4393,4778) ; v1(4943,4003) 5047,4003 5075,3975 v1(5075,3957) ; C31.1@5134,3711 5134.15,3710.85 v1(5134.15,3710.15) ; C32.1@5407,3986 C32.1@5408.28,3987.28 ; v1(5906,4861) v1@5909,4866
  Bottom Layer w12: C47.1@4372,4709 4376,4713 v1(4383,4713) ; C31.1@5125,3700 5125,3911 5192,3978 5252,3978 5274,4000 5313,4000 5335,3978 v1(5407,3978) ; R7.1@5941.99,5950 5969,5950
  Bottom Layer w15: P4.9@3205,3795 P4.10@3305,3795 3366,3795 3440.5,3720.5 3743.04,3720.5 4037.54,3426 4262,3426 4300,3388 v1(4300,3350) 4300,3205 4355.5,3149.5 4355.5,2785.5 ; P2.14@4175,2750 4212.81,2712.19 4257,2712.19 ; 4236.81,2712.19 4257,2712.19 ; v2(4491.99,2626.01) 4471,2647 4471,2752 4437.5,2785.5 4355.5,2785.5 ; C31.1@5125,3700 5172,3653 5172,3621.08 5188.58,3604.5 5213.5,3604.5 5244,3574 5244,3461 5205,3422 v2(5205,3326) ; P1.17@5405,2649 P1.19@5505,2649 ; C35.1@5529,4400 5571.5,4442.5 5571.5,4595.3 5541.5,4625.3 5541.5,4706.67 5518.17,4730 5465,4730 5443,4752 5443,4907 5468,4932 5632,4932 R14.2@5662,4902 ; C10.2@5645,4800 5645,4869.01 R14.2@5660.99,4885 5675.99,4900 5867,4900 v1(5906,4861) ; v2(5786,3183) 5805,3164 5982,3164 v2(6024,3206) ; R5.2@6000,5166.99 C2.2@6086,5166.99 ; R49.2@6031.65,3766.65 R49.2@6050,3785 R47.2@6150,3785 R48.2@6250,3785 ; RJ1.4@6088,5260 RJ1.4@6100,5248 ; RJ1.4@6089,5270 6089,5169.99 C2.2@6086,5166.99 ; C2.2@6100,5166.99 C2.2@6086,5166.99 ; C2.2@6112,5157 6200,5069 R3.2@6200,5033.01 6200,4874 6324,4750 v1(6441.99,4750.01) 6643,4750 6667,4774 P3.34@6805,4774 P3.32@6805,4674 ; C49.2@6285,3000 6286,3001 v1(6286,3002) ; 4257,2712.19 4282.19,2712.19 4355.5,2785.5
  Bottom Layer w20: P5.1@3300,4625 3488,4625 3535,4672 R29.2@3535,4725 R30.2@3535,4825 R31.2@3535,4925 R32.2@3535,5025 3603,5093 3603,5274.5 R40.1@3600,5277.5 3547.5,5225 R28.2@3535,5225 ; R24.2@4040,5300 R23.2@4040,5400 R25.2@4040,5500 4040,5607 4133,5700 4133,5820 4189,5876 4390,5876 4441,5825 5678.11,5825 5745.11,5758 5936,5758 5969,5791 5969,5950 6135,5950 ; v1(4061,3993) 4061,3921 4082,3900 R20.2@4140,3900 ; v1(4155,3900) 4155,3941 4229,4015 v1(4290,4015) ; U9.3@5305,3240 5323,3240 5404,3321 v3(5786,3321) ; C35.1@5525,4400 C35.1@5529,4400 ; v1(5654,5080) 5724,5080 5772,5128 v1(5772,5234) ; v1(5750,3735) L1.1@5750,3790 ; v1(5972,5483) C1.2@5975,5483.01 ; v1(5994,3573) 5950,3617 R46.2@5950,3645 5950,3717 v1(5952,3719) 5984,3719 R49.2@6031.65,3766.65 ; RJ1.5@6039,5370 6039,5419.01 C1.2@5975,5483.01 ; R2.2@6175,5616.99 6135,5616.99 ; R1.1@6175,5950 6135,5950 ; C1.2@5975,5483.01 5975,5537.44 6054.55,5616.99 R4.2@6075,5616.99 6135,5616.99 ; 6135,5616.99 6135,5950
  other v1: 5633,4791 5996,5167 3602,5187
+3.3IN: C37.2 C44.2 R37.2 U5.4 U5.17 | length 1084.6
  Top Layer w12: U5.17@4284.84,5162.2 4284.84,5215.84 4298,5229 4459,5229 4480,5250 4480,5299 4514,5333 v1@4514,5351 ; U5.4@4489.57,5437.79 4489.57,5375.43 v1@4514,5351 ; v1(4514,5356) v1@4514,5351 ; v1@4520,5345 v1@4514,5351
  Bottom Layer w12: C37.2@4520,5345 C37.2@4521,5345
  Bottom Layer w20: R37.2@4305,5735 4305,5703 C44.2@4404,5604 ; C44.2@4400,5600 4403.74,5600 4446.74,5557 4590.28,5557 4598,5549.28 4598,5413 C37.2@4550,5365
+5: C12.1 C14.1 C19.1 C21.1 C25.1 C39.2 C41.1 C42.2 J1.1 J3.1 P1.22 P1.24 P2.11 P3.27 P3.29 P3.30 P4.12 P4.14 R34.2 R35.1 R36.1 U3.7 U5.20 U6.16 VR1.3 VR2.4 | length 17706.7
  Top Layer w15: P4.14@3305,3595 3305,3565 3280,3540 3145,3540 ; C41.1@3650,5552.95 3643.95,5559 3449,5559 3373,5635 3172,5635 3098,5561 3098,3587 3145,3540 ; C41.1@3662,5513 3716,5513 3754,5475 3836,5475 ; J1.1@3748,5709 3748,5690 3836,5602 3836,5475 ; v1(3925,5475) U3.7@3905.51,5475 3836,5475 ; v1(3938,5373) 4047.42,5373 4120,5300.42 4120,5283.42 4186.5,5216.92 4186.5,5097.92 4206.92,5077.5 4256,5077.5 4315.71,5017.79 4377.21,5017.79 4389.5,5030.08 4389.5,5050.5 ; 4010,2541 4291,2541 ; VR2.4@4025,3717 VR2.4@4026,3717 ; 4054,3162 4054,2859 4027,2832 4027,2698 P2.11@4075,2650 ; J3.1@4242.99,5720.94 4243.94,5720 4273,5720 4294,5699 4294,5659 4307,5646 4392,5646 4488,5550 4697,5550 v1(4719,5528) 4771,5528 4818.5,5480.5 4818.5,5362.95 4868,5313.45 4868,5090.58 4852.92,5075.5 4729.92,5075.5 4704.92,5050.5 4389.5,5050.5 ; U5.20@4361.61,5162.2 4361.61,5078.39 4389.5,5050.5 ; v1(5300,5225) 5330,5195 5377,5195 ; U6.16@5375,5130.51 5375,5193 5377,5195 ; C39.2@5487,5195 5377,5195 ; v2(5940,2749) 5932,2749 5932,2724.7 5949.5,2707.2 5949.5,2599.5 5891,2541 5739,2541 4291,2541 ; 3145,3540 3105.69,3500.69 3105.69,2925 3165.84,2864.84 3257.8,2864.84 3386.01,2736.62 3386.01,2593.99 3439,2541 4291,2541
  Top Layer w20: C19.1@3825,3132.68 3958.68,3132.68 3999,3173 4054,3173 ; VR2.4@4025,3725.2 4025,3717 4025,3591 4054,3562 4054,3173 ; VR2.4@4043,3496 4120,3496 4149.2,3525.2 VR1.3@4209.45,3525.2 ; 4054,3162 4054,3173 ; C12.1@4116,3249 v1(4122,3255) ; C12.1@4125,3173 4054,3173
  Bottom Layer w15: R34.2@3535,5525 3566,5525 v1(3601,5560) ; v1(3925,5475) 3927,5473 C25.1@3927,5441 ; v1@3936,5375 C25.1@3936,5403 ; v1(4719,5528) 4855,5528 5100.41,5282.59 ; R35.1@4925,5225 4925,5244 4963.59,5282.59 5100.41,5282.59 ; v1(5300,5225) 5331,5194 5331,5155 5298,5122 5213,5122 5163,5172 5128,5172 5114,5186 5114,5269 5100.41,5282.59 ; P1.22@5605,2749 P1.24@5705,2749 6253,2749 6432,2928 6834,2928 6989,3083 6989,4514 6989,4542 6957,4574 P3.29@6905,4574 P3.30@6805,4574 ; P3.27@6900,4450 P3.29@6900,4550
  Bottom Layer w20: P4.14@3305,3595 P4.12@3305,3695 3732.48,3695 4074.19,3353.29 4074.19,3350 C21.1@4075,3350 4121,3350 ; v1(4122,3255) v1(4122,3292) 4122,3350 ; C14.1@4200,3350 4122,3350 ; 4121,3350 4122,3350 ; 4121,3350 4122,3350
  other v1: 4121,3328
CTS: J4.7 U6.8 | length 423.6
  Top Layer w15: J4.7@4995.47,5730.89 4995.47,5398.53 5025,5369 U6.8@5025,5319.49
D1+: J3.3 R37.1 R39.2 | length 333.1
  Top Layer w12: J3.3@4180,5720.94 4180,5639 4218,5601 v1(4296,5601)
  Bottom Layer w12: v1(4296,5601) 4299,5601 R37.1@4300,5600 R39.2@4300,5485
D1-: J3.2 R38.1 | length 179.4
  Top Layer w8: J3.2@4211.5,5720.94 4211.5,5657.72 v1(4214,5655.22)
  Bottom Layer w8: R38.1@4200,5750 4204,5754 4211,5754 4212,5753 4212,5658 4214,5656 v1(4214,5655.22)
GND: BT1.2 C1.1 C2.1 C3.1 C4.1 C5.2 C6.2 C7.1 C8.1 C9.2 C10.1 C11.1 C12.2 C13.2 C14.2 C15.2 C16.2 C17.2 C18.2 C19.2 C20.2 C21.2 C22.2 C23.2 C24.1 C25.2 C26.2 C27.2 C28.2 C29.2 C30.2 C31.2 C32.2 C33.2 C34.2 C35.2 C36.1 C37.1 C38.1 C39.1 C41.2 C42.1 C43.1 C44.1 C46.1 C47.2 C49.1 CN1.6 CN1.9 D1.2 D2.2 D3.2 D4.2 D5.2 J1.4 J2.4 J2.6 J3.4 J3.5 J3.6 J4.5 J4.10 J4.11 K11.1 Osc1.2 P1.21 P1.23 P2.13 P3.31 P3.33 P4.11 P4.13 P5.4 P5.6 P5.8 P5.10 P5.12 P5.14 P5.16 P5.18 P5.20 POWER1.2 R13.1 R17.2 R27.1 R50.1 RJ1.13 RJ1.14 S1.1 U1.15 U1.19 U1.35 U1.36 U1.47 U2.10 U2.19 U2.27 U2.49 U2.74 U2.99 U3.6 U5.7 U5.18 U5.21 U5.22 U5.23 U5.25 U5.26 U6.15 U8.7 U9.1 VR1.1 VR2.1 | length 5803.5
  Top Layer w8: U5.21@4387.2,5162.2 U5.22@4412.8,5162.2 U5.23@4438.39,5162.2 4438.39,5101.61 4450.16,5089.84 4515.16,5089.84 ; U5.25@4489.57,5162.2 U5.26@4515.16,5162.2 ; v1@4617,5089.84 4515.16,5089.84 ; v1(4649,5432) 4649,5356 4515.16,5222.16 U5.26@4515.16,5162.2 ; v1(4800,3926) 4798,3941 4824.6,3967.6 U2.99@4867.09,3967.6 ; U2.74@4954.69,4488.27 4954.69,4553.69 v1(4955,4554) ; D4.2@5080,4745 5085,4740 D3.2@5200,4740 ; U2.10@5112.17,3880 5112.17,3739.54 5083,3710.37 5083,3649 v1(5120,3612) ; U2.19@5289.33,3880 v1@5289.33,3944.67 ; v1(5399.33,4400.67) U2.49@5475.35,4400.67 ; U2.27@5475.35,3967.6 5521.4,3967.6 v1(5552,3937) ; 5751.32,5445.74 5740,5434.42 5740,5201.99 R13.1@5775,5166.99 ; C9.2@5807,4484 v1(5855,4436) 6017,4436 6063.58,4482.58 U1.47@6063.58,4613.58 6063.58,4683.42 6062,4685 ; 5965.16,4865.16 U1.19@5965.16,4936.42 5965.16,4978.16 5976.76,4989.76 5988.76,4989.76 6014,5015 6014,5086 v1@6006,5094 ; U1.15@6043.9,4936.42 6043.9,4861.1 v1@6045,4860 ; 4515.16,5089.84 U5.26@4515.16,5162.2
  Top Layer w10: U5.18@4310.43,5162.2 4310.43,5090.57 4326,5075 ; v1(4350,5547) 4354,5547 4412.8,5488.2 U5.7@4412.8,5437.79 ; v1(5086,3212) 5086,3279 5181.04,3374.04 5247.96,3374.04 5258,3364 5258,3325 5205,3272 U9.1@5205,3240 ; R13.1@5775,5166.99 5802.52,5166.99 5865.51,5104 v1(6003,5104)
  Top Layer w12: v1(4357,4597) 4380,4620 U8.7@4434.41,4620
  Bottom Layer w8: C14.2@4200,3485 C15.2@4300,3485 C15.2@4305,3480 ; 4817,4689 4837,4669 v1(5043,4669) ; v1(4955,4554) v1@4955,4556 ; v1(5120,3612) 5122,3610 C31.2@5125,3610 ; v1@5288,3946 v1@5289.33,3944.67 ; v1(5290,3955) 5308.15,3936.85 5308.15,3852.15 ; v1@5399,4401 v1(5399.33,4400.67)
  Bottom Layer w10: P2.13@4175,2650 4266,2650 4286,2630 v1(4357,2630)
  Bottom Layer w15: C35.2@5435,4400 5435,4464 5502,4531 v1(5502,4692) ; C23.2@5475,3390 5352,3390 5290,3452 5290,3704 5266,3728 5266,3810 5308.15,3852.15 5477.15,3852.15 5515,3890 C32.2@5515,3975
  Bottom Layer w20: C16.2@4850,3390 C17.2@4950,3390 v1(5075,3390)
  other v1: 4420,2631 6198,2673 4420,2680 4359,2681 4422,2728 6196,2800 5903,2803 5985,2803 3981,2876 3855,2878 3977,2920 3625,2927 3345,2948 4448,2973 5347,2976 5403,2976 5452,2976 3699,3011 4445,3014 3688,3026 3346,3030 6174,3042 3660,3053 3473,3069 3745,3087 4003,3106 5066,3124 5034,3126 5102,3126 3742,3175 5645,3210 5855,3211 5741,3212 5927,3214 4353,3221 4467,3250 4469,3322 5319,3344 5650,3371 4467,3414 5850.01,3414.99 5649,3416 4350,3420 4351,3468 5854,3482 6329,3546 5070,3608 4374,3627 4403,3651 4074,3655 4151,3656 4340,3695 6179,3716 6250,3716 6330,3717 4483,3723 4761,3732 4265,3733 4794,3783 3881,3789 4064,3803 3789,3816 3651,3836 3518,3843 4065,3844 3592,3846 3404,3849 6336,3861 6063,3864 6149,3866 3789,3867 5803,3867 5737,3869 3789,3920 4283,3967 5938,3996 6097,3998 3408,4037 3523,4037 3644,4043 4182,4043 3727,4050 4275,4077 3852,4084 3926,4084 3980,4084 4535,4106 4180,4108 3458,4129 4177,4167 4287,4277 3386,4319 3722,4319 3901,4321 3600,4322 3972,4392 6268,4393 6354,4393 6128,4401 5949,4436 4045,4451 3903,4452 6355,4465 6463,4466 5799,4488 3311,4489 5729,4490 3433,4492 3610,4494 5660,4496 6358,4658 6536,4659 5087,4670 5761,4674 5431,4705 5543,4798 3642,4801 6525,4813 3733,4832 3606,4836 6054,4861 6273,4891 6635,4931 6886,4931 5338,4976 5294,5002 5387,5003 5564,5006 5473,5008 4144,5020 4218,5035 4334,5055 5591,5073 4414,5098 4616,5101 6089,5102 5435,5104 6220,5105 4141,5137 4082,5177 4824,5250 4294,5272 4380,5273 4415,5355 4370,5356 4887,5406 4761,5482 5160,5505 4953,5512 3926,5530 4256,5540 4124,5629 4037,5669 3829,5809 3919,5812 4031,5821 4332,5821 5732,5841 3738,5920 4112,5942 4200,5945 4550,5949 5656,5960
  other v2: 4105,2912 6065,2953 5604,2974 6089,3203 5023,3330
  other v4: 6093,2801
"LED ACT": RJ1.11 U1.26 | length 1167.5
  Top Layer w8: U1.26@5813.58,4863.58 5765.42,4863.58 5757,4872 5757,4966 5724,4999 ; RJ1.11@5903.02,5811.92 5693,5601.9 5693,5435 5724,5404 5724,5026 ; 5724,4999 5724,5026 ; 5724,4999 5724,5026 ; 5724,4999 5724,5026
"LED LINK": RJ1.10 U1.28 | length 1614.5
  Top Layer w8: 5708,5026 5708,4992.37 ; U1.28@5813.58,4824.21 5766.79,4824.21 5741,4850 5741,4959.37 5708,4992.37 ; RJ1.10@6224.68,5811.92 6003.08,5811.92 5945,5870 5883,5870 5854,5841 5854,5785.53 5677,5608.53 5677,5428.37 5708,5397.37 5708,4992.37
NetBT1_1: BT1.1 U2.6 | length 1602.9
  Top Layer w8: v1(4408,3790) 4732.63,3790 4768.63,3826 4828.24,3826 4901.24,3753 5015.43,3753 5033.43,3771 U2.6@5033.43,3880
  Bottom Layer w8: BT1.1@3950,3900 3950,3692 4026,3616 4313,3616 4408,3711 v1(4408,3790)
NetC5_1: C5.1 C6.1 C7.2 C8.2 U1.18 U1.23 U1.37 | length 1396.1
  Top Layer w8: v1(5825,5095) 5823,5093 5823,5006 5836,4993 5878,4993 5886.42,4984.58 U1.23@5886.42,4936.42 5886.42,4894 5869,4876.58 5869,4840 5888,4821 v1@5924,4821 ; U1.37@5866.73,4613.58 5866.92,4613.77 5866.92,4763.92 v1@5924,4821 ; U1.18@5984.84,4936.42 5984.84,4833.84 5972,4821 v1@5924,4821 ; v1(6292.32,4600) C5.1@6298,4600
  Bottom Layer w8: v1(5825,5095) 5827,5097 5869,5055 C7.2@5875,5055 ; v1(6292.32,4600) C6.1@6330,4600
  Bottom Layer w15: v1@5924,4821 5924,4815.8 6009.8,4730 6239,4730 6292.32,4676.68 v1(6292.32,4600)
  other v1: 5917.04,4814.04
NetC22_1: C22.1 U2.12 X2.2 | length 464.7
  Top Layer w8: U2.12@5151.54,3880 5151.54,3758 5175,3734.54 X2.2@5175,3525
  Bottom Layer w8: C22.1@5075,3525 X2.2@5175,3525
NetC23_1: C23.1 R16.2 X2.1 | length 238.6
  Bottom Layer w15: R16.2@5355,3658 R16.2@5361.5,3651.5 ; R16.2@5360,3650 5360,3543 5378,3525 C23.1@5475,3525
NetC36_2: C36.2 U5.28 Y1.1 | length 313.8
  Top Layer w12: U5.28@4566.34,5162.2 4617.2,5162.2 4655,5200 Y1.1@4750,5200
  Bottom Layer w12: C36.2@4650,5235 4685,5200 Y1.1@4750,5200
NetC38_2: C38.2 U5.27 Y1.2 | length 459.1
  Top Layer w8: U5.27@4540.75,5162.2 4540.75,5225.12 4715.63,5400 Y1.2@4750,5400
  Bottom Layer w12: C38.2@4650,5365 4715,5365 Y1.2@4750,5400
NetC40_1: C40.1 U6.3 | length 151.2
  Top Layer w15: U6.3@5275,5319.49 5275,5385 5325,5435 C40.1@5325,5450
NetC40_2: C40.2 U6.1 | length 165.7
  Top Layer w15: U6.1@5375,5319.49 5375,5365 C40.2@5460,5450
NetC43_2: C43.2 U6.2 | length 252.7
  Top Layer w15: U6.2@5325,5319.49 5325,5267 5351,5241 5392,5241 5451,5300 C43.2@5490,5300
NetC45_1: C45.1 U6.5 | length 179.2
  Top Layer w15: C45.1@5100,5450 5130,5450 5175,5405 U6.5@5175,5319.49
NetC45_2: C45.2 U6.4 | length 140.5
  Top Layer w8: C45.2@5225,5445 5225,5450 C45.2@5235,5450
  Top Layer w15: U6.4@5225,5319.49 C45.2@5225,5445
NetC46_2: C46.2 U6.6 | length 81.2
  Top Layer w15: U6.6@5125,5319.49 v1(5125,5380)
  Bottom Layer w8: C46.2@5123,5382 5123,5380 5123,5367 C46.2@5125,5365
  Bottom Layer w15: C46.2@5123,5382 v1(5125,5380)
NetD1_1: D1.1 R15.2 | length 204.5
  Top Layer w15: D1.1@4571,3270 4571,3243 4627.58,3186.42 4636.58,3186.42 4673,3150 R15.2@4710,3150
NetD2_1: D2.1 R42.2 | length 15
  Bottom Layer w8: R42.2@5325,4885 v1(5325,4900)
NetD3_1: D3.1 R43.2 | length 15
  Bottom Layer w8: R43.2@5200,4885 v1(5200,4900)
NetD4_1: D4.1 R44.2 | length 15
  Bottom Layer w8: R44.2@5075,4885 v1(5075,4900)
NetD5_1: D5.1 R45.2 | length 15
  Bottom Layer w8: R45.2@4950,4885 v1(4950,4900)
NetJ1_2: J1.2 R19.2 | length 188.9
  Top Layer w8: J1.2@3716.5,5720.94 3716.5,5711 J1.2@3717,5711
  Top Layer w15: J1.2@3717,5711 3717,5674.9 3788,5603.9 v1(3788,5562)
NetJ1_3: J1.3 R18.2 R40.2 | length 395.2
  Top Layer w15: J1.3@3685,5720.94 3683.06,5719 3683.06,5673.94 3734,5623 v1(3734,5561)
  Bottom Layer w8: R40.2@3600,5422.5 3700,5522.5 R18.2@3700,5560 3701,5561 v1(3734,5561)
NetJ1_5: J1.5 J1.6 J2.5 | length 3366.3
  Top Layer w8: J1.6@3509.8,5724.88 3509.8,5715 3519,5715 3519,5721 3519,5722 J1.6@3518,5722
  Top Layer w15: J1.6@3518,5722 3519.06,5720.94 J1.5@3622.01,5720.94 3622.01,5794.01 3684.52,5856.52 4507.52,5856.52 4540.5,5889.5 5897,5889.5 6070,5889.5 6350.5,5889.5 6392,5848 6392,5821 6392,5777 6465.34,5703.66 J2.5@6625.59,5703.66
NetJ2_2: J2.2 R21.1 | length 156.6
  Bottom Layer w15: R21.1@6425,5325 6425,5375 6455.63,5405.63 J2.2@6518.9,5405.63
NetJ2_3: J2.3 R22.1 | length 281.6
  Bottom Layer w15: R22.1@6325,5325 6325,5362 6447.37,5484.37 J2.3@6518.9,5484.37
NetK10_1: K10.1 R17.1 U2.94 | length 450.1
  Top Layer w8: K10.1@4525,3975 4622,3975 4675,4028 R17.1@4675,4100 4710,4100 4743.98,4066.02 U2.94@4867.09,4066.02
NetOsc1_1: Osc1.1 R14.1 | length 19.8
  Top Layer w8: v1(5523,4891) 5525,4893 Osc1.1@5525,4900
  Bottom Layer w8: v1(5523,4891) 5527.01,4891 R14.1@5527.01,4885
NetP2_1: 
NetP2_2: 
NetP5_11: P5.11 R33.1 | length 100
  Bottom Layer w8: P5.11@3300,5125 R33.1@3400,5125
NetP5_19: P5.19 R34.1 | length 109.2
  Bottom Layer w20: P5.19@3300,5525 R34.1@3400,5525 3405,5525 R34.1@3408,5522
NetR1_2: R1.2 RJ1.9 | length 144.2
  Bottom Layer w15: R1.2@6310,5950 6310,5892 6324.68,5877.32 RJ1.9@6324.68,5811.92
NetR2_1: R2.1 RJ1.1 U1.17 | length 967.7
  Top Layer w8: U1.17@6004.53,4936.42 6004.53,4980.06 6039,5014.53 6039,5292 5988,5343 5988,5412 6013,5437 6220,5437 6239,5418 RJ1.1@6239,5370
  Bottom Layer w15: R2.1@6175,5483.01 6239,5419.01 RJ1.1@6239,5370
NetR3_1: R3.1 RJ1.2 U1.16 | length 662.7
  Top Layer w8: U1.16@6024.21,4936.42 6024.21,4977.11 6068.1,5021 6210,5021 6259,5070 6259,5244 6233,5270 RJ1.2@6189,5270
  Bottom Layer w15: R3.1@6189,5176 RJ1.2@6189,5270
NetR4_1: R4.1 RJ1.3 U1.14 | length 818.5
  Top Layer w8: U1.14@6063.58,4936.42 6063.58,4987.58 6081,5005 6221,5005 6278,5062 6278,5260 6198.77,5339.23 6169.77,5339.23 RJ1.3@6139,5370
  Bottom Layer w15: R4.1@6075,5483.01 6139,5419.01 RJ1.3@6139,5370
NetR5_1: R5.1 RJ1.6 U1.13 | length 494.9
  Top Layer w8: U1.13@6083.27,4936.42 6083.27,4936.73 6114.27,4936.73 v1(6115,4936)
  Bottom Layer w8: RJ1.6@5989,5270 5955.5,5236.5 5955.5,5077.51 R5.1@6000,5033.01 6000,4968 6032,4936 v1(6115,4936)
NetR6_2: R6.2 U1.39 | length 106.8
  Top Layer w8: R6.2@5900,4516.99 5909,4516.99 5909,4518 5906.1,4520.9 U1.39@5906.1,4613.58
NetR7_2: R7.2 RJ1.12 | length 140.1
  Bottom Layer w15: RJ1.12@5803.02,5811.92 5803.02,5945.01 R7.2@5808.01,5950
NetR10_2: R10.2 U1.7 | length 175.7
  Top Layer w8: U1.7@6136.42,4784.84 6199.16,4784.84 6209,4775 R10.2@6308.01,4775
NetR11_1: R11.1 U1.21 | length 124.7
  Top Layer w8: R11.1@5875,5033.01 5887,5033.01 5898,5022.01 5898,5017 5925.79,4989.21 U1.21@5925.79,4936.42
NetR12_1: R12.1 U1.20 | length 114.1
  Top Layer w8: U1.20@5945.47,4936.42 5945.47,5006.47 5966,5027 5966,5033.01 R12.1@5975,5033.01
NetR13_2: R13.2 U1.24 | length 171
  Top Layer w8: R13.2@5775,5033.01 5775,4966 5804.58,4936.42 U1.24@5866.73,4936.42
NetR16_1: R16.1 U2.13 | length 247.8
  Top Layer w8: U2.13@5171.22,3880 5171.22,3783.78 5216,3739 v1(5216,3655)
  Bottom Layer w8: R16.1@5225,3650 R16.1@5228,3653
NetR25_1: R25.1 U3.4 | length 177.2
  Top Layer w12: U3.4@4094.49,5575 4142,5575 4186,5531 v1(4186,5510)
  Bottom Layer w8: R25.1@4175,5500 4162,5500 4162,5505 4175,5505 4185,5505 R25.1@4185,5509
  Bottom Layer w12: R25.1@4185,5509 v1(4186,5510)
NetR28_1: R28.1 R33.2 | length 162.4
  Bottom Layer w8: R28.1@3412,5220 3507,5125 R33.2@3535,5125
NetR38_2: R38.2 U5.16 | length 871.7
  Top Layer w8: v1(4077,5747) 4077,5644 4020,5587 4020,5428 4140,5308 4140,5291 4206,5225 4206,5106 4215,5097 4247,5097 4259.25,5109.25 U5.16@4259.25,5162.2
  Bottom Layer w8: R38.2@4065,5750 4065,5747 v1(4077,5747)
NetR39_1: R39.1 U5.15 | length 216.1
  Top Layer w10: U5.15@4233.66,5162.2 4233.66,5280.66 v1(4301,5348)
  Bottom Layer w10: R39.1@4300,5350 4301,5349 v1(4301,5348)
NetR50_2: R50.2 S2.2 S3.2 S4.2 S5.2 | length 2154.4
  Top Layer w40: S3.2@5654.41,3798.48 v1@5850,3798.48 ; v1(5850,3783) v1@5850,3798.48 ; S5.2@5960,3493 5965.48,3498.48 S5.2@5968.41,3498.48 6104,3498.48 ; S2.2@5964.41,4087.48 S2.2@6229,4087.48 ; S5.2@6244,3498.48 6104,3498.48 ; S4.2@6544,3798.48 6400,3798.48 ; v1@5850,3798.48 S3.2@5930,3798.48 6098,3798.48 ; 6098,3798.48 S4.2@6268.41,3798.48 6400,3798.48 ; 6098,3798.48 6104,3792.48 6104,3498.48 ; S2.2@6229,4087.48 S2.2@6240,4087.48 ; S2.2@6229,4087.48 S2.2@6240,4087.48 ; S2.2@6240,4087.48 6268.52,4087.48 6400,3956 6400,3798.48
  Bottom Layer w40: v1(5850,3783) R50.2@5850,3785